# Altium PCB Adapter.PcbDoc
Units mm, origin at the board's own origin, x right, y up, seen from the top; angles counter-clockwise.
Board outline 63.12 x 34.8 mm, 2 copper layers (Top Layer, Bottom Layer); 28 components, 27 nets, 119 pads, 3 vias.
Unrouted connection lines stored in the file: 2.
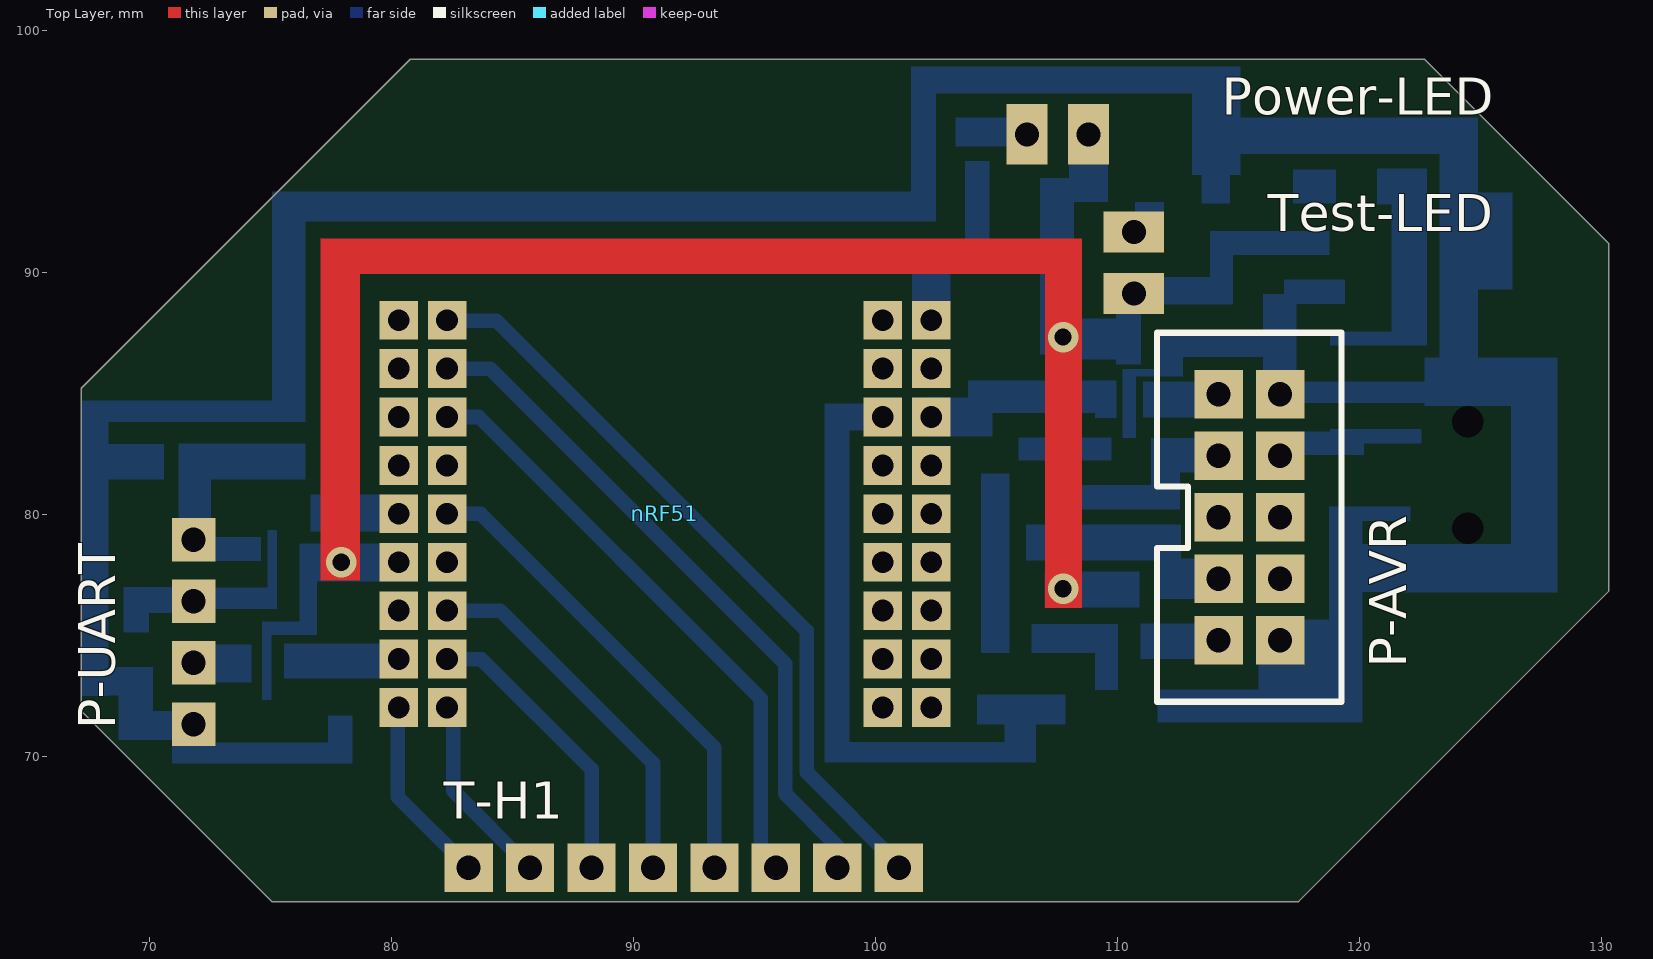
[diagram p0: Top Layer view]
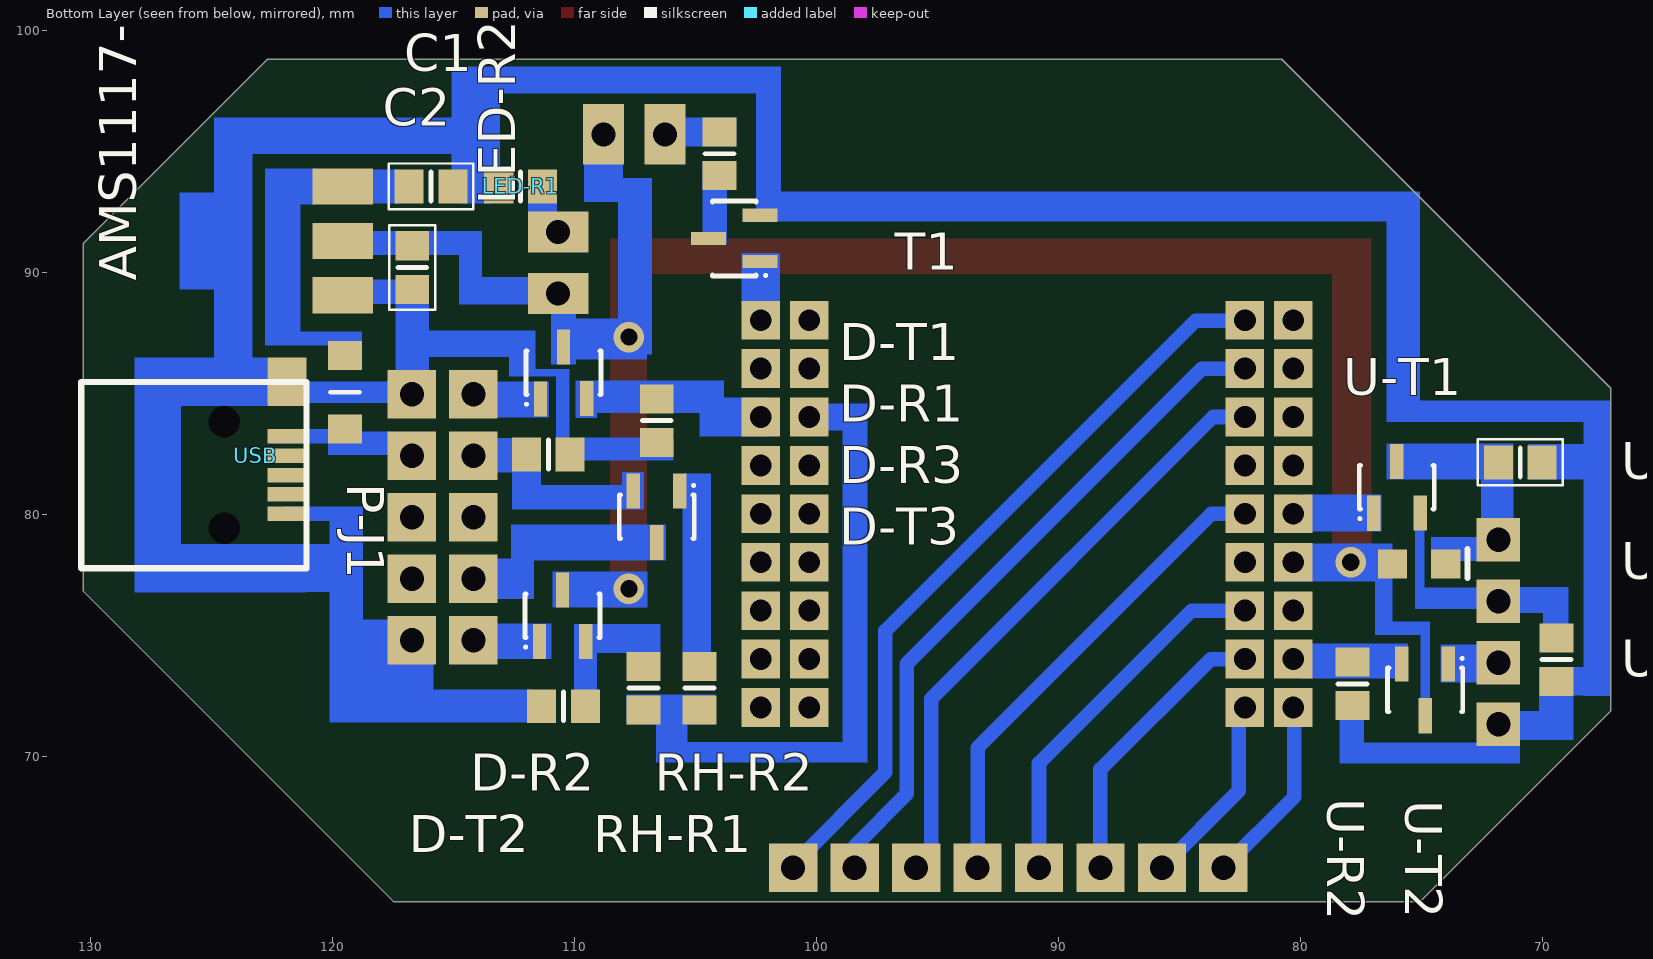
[diagram p1: Bottom Layer view, seen from below]
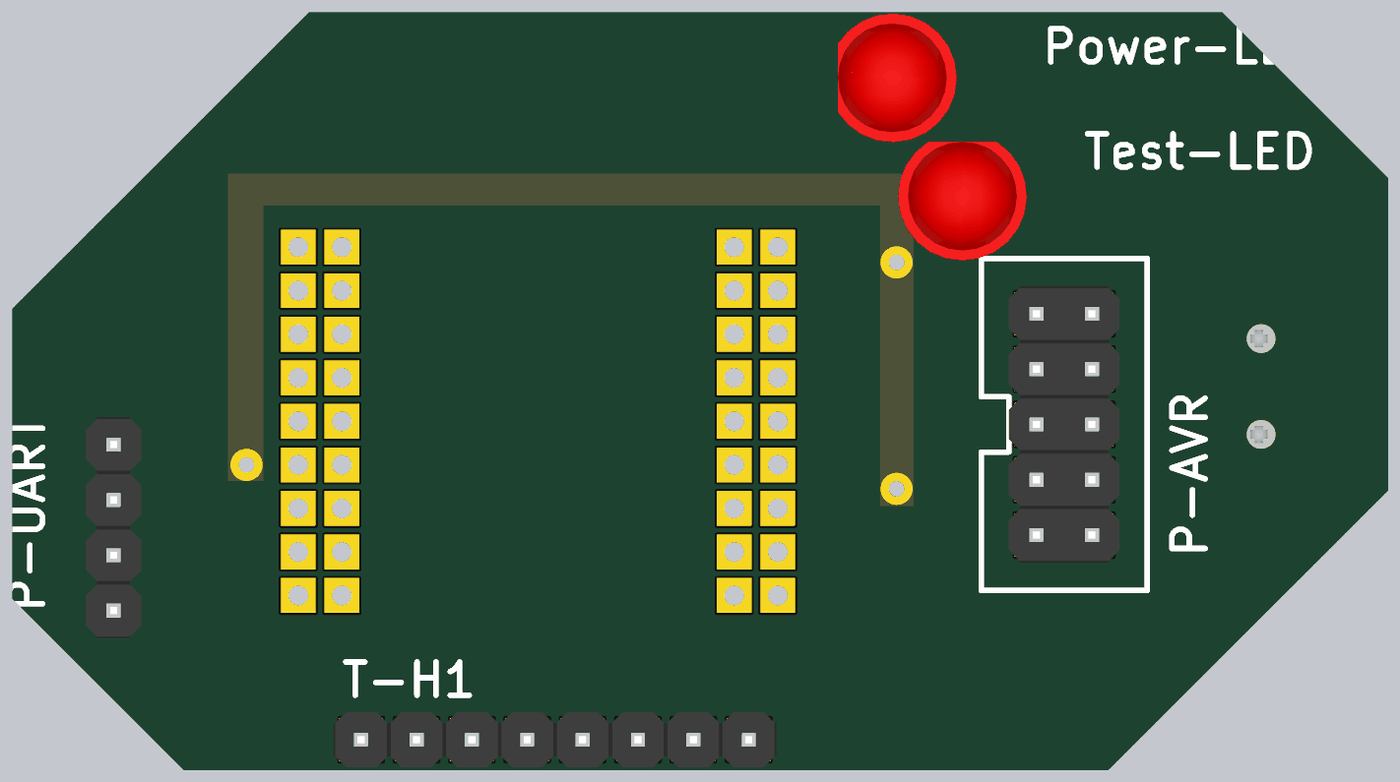
[diagram p2: 3D render of the assembled board from above, using the file's embedded part models]
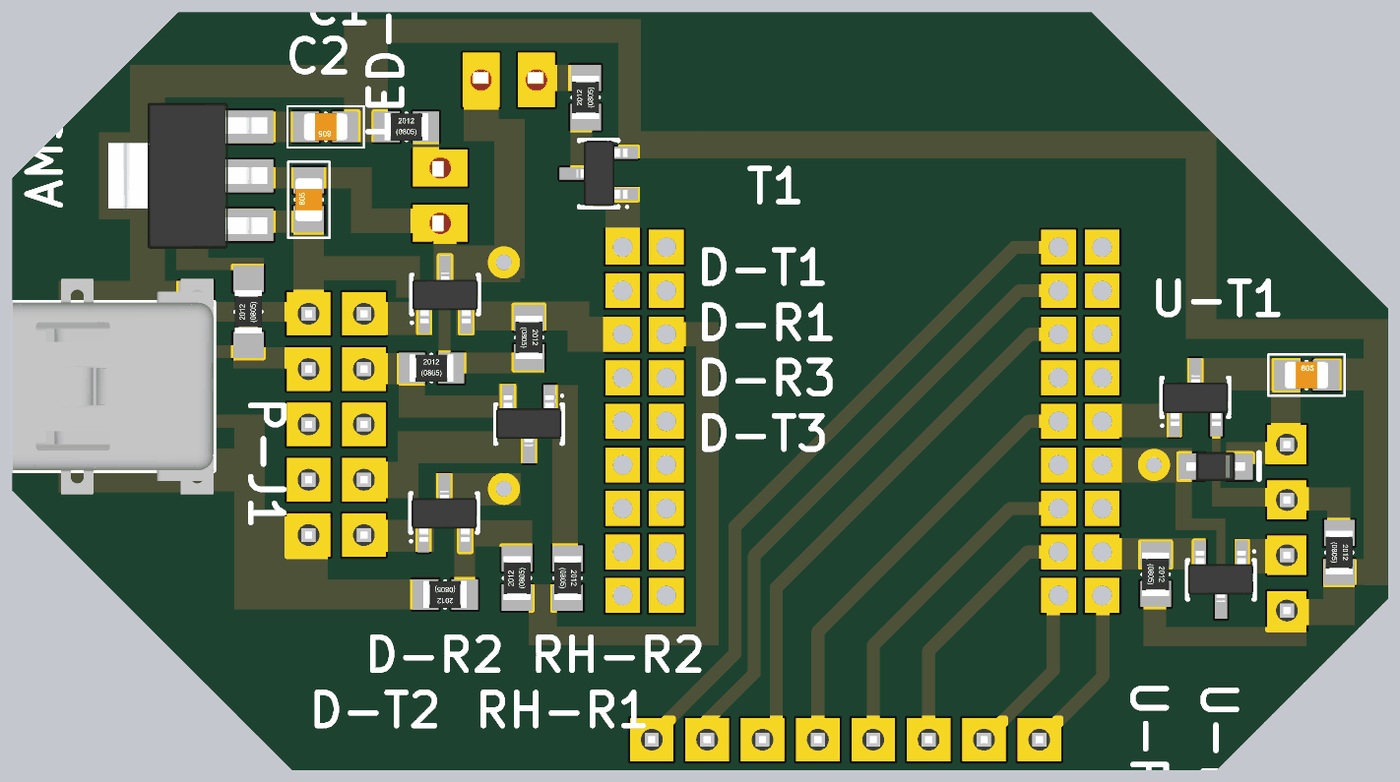
[diagram p3: 3D render of the assembled board from below, using the file's embedded part models]

## Layer stack, top to bottom
Top Solder: solder mask 0.0102, Solder Resist, Dk 3.5
Top Layer: signal copper 0.0356
Dielectric 1: dielectric 0.32, FR-4, Dk 4.8
Bottom Layer: signal copper 0.0356
Bottom Solder: solder mask 0.0102, Solder Resist, Dk 3.5

## Board outline
67.183,71.882 75.057,64.008 117.475,64.008 130.302,76.835 130.302,91.186 122.682,98.806 80.772,98.806 67.183,85.217

## Design rules (kind name [scope] priority, off if disabled: settings)
Clearance [All] p1: gap=0.254
PolygonConnect [All] p1: connectstyle=Relief reliefconductorwidth=0.254 reliefentries=4 polygonreliefangle="90 Angle" airgapwidth=0.254
RoutingVias [All] p1: holewidth=0.711 width=1.27 viastyle="Through Hole" minholewidth=0.711 minwidth=1.27 maxholewidth=0.711 maxwidth=1.27
SolderMaskExpansion [All] p1: expansion=0.102
Width [All] p1: maxlimit=0.254 minlimit=0.254 preferedwidth=0.254
30 further rules are at their usual default settings.

## Classes and differential pairs
component class "Voltage Regulator": AMS1117-3.3 C1 C2
component class Top: LED-R2 nRF51 T1 T-H1 Test-LED
component class Debug: RH-R1 RH-R2
component class Debugging: D-R1 D-R2 D-R3 D-T1 D-T2 D-T3 P-AVR
component class "Serial Port": P-UART U-C1 U-D1 U-R1 U-R2 U-T1 U-T2
component class "USB or Debugger": LED-R1 P-J1 Power-LED USB

## Components (designator, comment, footprint, x,y, rotation, side; value= is the part's Value field where it differs from the comment)
AMS1117-3.3 "T1" SOT-223-3 118.825,88.05 r90 bottom
C1 "22uF" "C 0805 / 2012" 115.925,93.55 r0 bottom
C2 "22uF" "C 0805 / 2012" 116.7,90.2 r90 bottom
D-R1 "5K6" "R 0805 / 2012" 106.6,83.875 r270 bottom
D-R2 "5K6" "R 0805 / 2012" 110.45,72.075 r0 bottom
D-R3 "5K6" "R 0805 / 2012" 111.075,82.475 r180 bottom
D-T1 "2N7000" SOT-23-3 110.45,85.85 r180 bottom
D-T2 "2N7000" SOT-23-3 110.49,75.819 r180 bottom
D-T3 "2N7000" SOT-23-3 106.6,79.9 r0 bottom
LED-R1 "?R" "R 0805 / 2012" 112.225,93.55 r180 bottom
LED-R2 "?R" "R 0805 / 2012" 104,94.9 r90 bottom
nRF51 "Core51822_2" Core51822 79.3,71.025 r0 top
P-AVR "AVR-style JTAG" "Header 2x5" 114.173,84.963 r0 top
P-J1 "0R" "R 0805 / 2012 wide" 119.475,85.05 r90 bottom
P-UART "Header 1x4" "Header 1x4" 71.825,73.875 r270 top
Power-LED "TH Green" "LED 3mm" 110.675,89.125 r90 top
RH-R1 "430R" "R 0805 / 2012" 107.15,72.825 r90 bottom
RH-R2 "430R" "R 0805 / 2012" 104.825,72.825 r270 bottom
T1 "2N7000" SOT-23-3 103.4,91.4 r90 bottom
T-H1 "Header 1x8" "Header 1x8 very long" 88.265,65.405 r0 top
Test-LED "TH Blue" "LED 3mm" 108.8,95.7 r180 top
U-C1 "100nF" "C 0805 / 2012" 70.925,82.15 r180 bottom
U-D1 "Diode" SC-90 75.1,77.975 r180 bottom
U-R1 "5K6" "R 0805 / 2012" 69.425,74 r270 bottom
U-R2 "5K6" "R 0805 / 2012" 77.85,73 r270 bottom
U-T1 "2N7000" SOT-23-3 76.025,81.125 r180 bottom
U-T2 "2N7000" SOT-23-3 74.85,72.75 r0 bottom
USB "P-miniUSB" miniUSB 125.575,81.625 r270 bottom

## Footprints (in the part's own frame and the unit in brackets; to place one, negate y for a bottom-side part, rotate by r counter-clockwise, add the part's x,y. Pads: shape width x height; smd on the part's side, far side on the other; paste and mask are expansions set on the pad)
"C 0805 / 2012" [mm] "Capacitor 0805 / 2012 (2.0 x 1.2 mm)"
  rect 1.2x1.4 smd: 1(-0.9,0) 2(0.9,0)
  silkscreen extent -1.75,-0.95 1.75,0.95, body extent -1,-0.62 1,0.63, height 0.78
Core51822 [mm]
  rect 1.6x1.6 hole 0.9: 1(1,17) 2(3,17) 3(1,15) 4(3,15) 5(1,13) 6(3,13) 7(1,11) 8(3,11) 9(1,9) 10(3,9) 11(1,7) 12(3,7) 13(1,5) 14(3,5) 15(1,3) 16(3,3) 17(1,1) 18(3,1) 19(21,17) 20(23,17) 21(21,15) 22(23,15) 23(21,13) 24(23,13) 25(21,11) 26(23,11) 27(21,9) 28(23,9) 29(21,7) 30(23,7) 31(21,5) 32(23,5) 33(21,3) 34(23,3) 35(21,1) 36(23,1)
"Header 1x4" [mm] "2.54mm"
  rect 1.8x1.8 hole 1: 1(-5.08,0) 2(-2.54,0) 3(0,0) 4(2.54,0)
  body extent -6.35,-1.27 3.81,1.27, height 8.6
"Header 1x8 very long" [mm] "2.54mm"
  rect 2x2 hole 1: 1(-5.08,0) 2(-2.54,0) 3(0,0) 4(2.54,0) 5(5.08,0) 6(7.62,0) 7(10.16,0) 8(12.7,0)
  body extent -6.35,-1.27 13.97,1.27, height 8.6
"Header 2x5" [mm]
  rect 2x2 hole 1: 1(0,0) 2(2.54,0) 3(0,-2.54) 4(2.54,-2.54) 5(0,-5.08) 6(2.54,-5.08) 7(0,-7.62) 8(2.54,-7.62) 9(0,-10.16) 10(2.54,-10.16)
  silkscreen extent -2.54,-12.7 5.08,2.54, body extent -1.27,-11.43 3.81,1.27, height 8.6
"LED 3mm" [mm] "2.54mm"
  rect 1.7x2.5 hole 1: 1(0,0) 2(2.54,0)
  body extent -1.71,-3.05 3.74,2.85, height 18.6
miniUSB [mm]
  rect 0.6x1.6 smd: 1(-1.6,3.7) 2(-0.8,3.7) 3(0,3.7) 4(0.8,3.7) 5(1.6,3.7)
  rect 2x1.6 smd: 6(-3.85,3.7)
  rect 0x0 hole 1.3: 10(-2.2,1.1) 20(2.2,1.1)
  Top Layer region: -4.85,2.9 -2.85,2.9 -2.85,-2.6 -4.85,-2.6
  Top Layer region: 2.85,4.5 4.85,4.5 4.85,-1 2.85,-1
  Top Layer region: 2.85,-1 4.85,-1 4.85,-2.6 2.85,-2.6
  silkscreen extent -3.85,-4.8 3.85,4.5, body extent -4.95,-4.7 4.95,4.5, height 4.14
"R 0805 / 2012" [mm] "Resistor 0805 / 2012 (2.0 x 1.2 mm)"
  rect 1.2x1.4 smd: 1(-0.9,0) 2(0.9,0)
  silkscreen extent 0,-0.6 0,0.6, body extent -1,-0.63 1,0.62, height 0.45
"R 0805 / 2012 wide" [mm] "Resistor 0805 / 2012 (2.0 x 1.2 mm)"
  rect 1.2x1.4 smd: 1(-1.524,0) 2(1.524,0)
  silkscreen extent 0,-0.6 0,0.6, body extent -1,-0.63 1,0.62, height 0.45
SC-90 [mm]
  rect 1.2x1.2 smd: 1(1.1,-0.025) 2(-1.1,-0.025)
  silkscreen extent 2,-0.6 2,0.6, body extent -1.35,-0.7 1.35,0.65, height 0.85
SOT-23-3 [mm]
  rect 0.55x1.45 smd: 1(-0.95,-1.075) 2(0.965,-1.067) 3(0,1.067)
  silkscreen extent -1.58,-1.35 1.55,0.9, body extent -1.49,-1.32 1.51,1.28, height 1.1
SOT-223-3 [mm]
  rect 1.5x2.5 smd: 1(1,0.75) 2(3.25,0.75) 3(5.5,0.75)
  Top Layer region: 1.25,7.5 5.25,7.5 5.25,4.5 1.25,4.5
  body extent -0.1,-0.22 6.6,7.08, height 1.8

## Part data
AMS1117-3.3: library part AMS1117
C1 C2 U-C1: library part Capacitor
D-R1 D-R2 D-R3 LED-R1 LED-R2 P-J1 RH-R1 RH-R2 U-R1 U-R2: library part Resistor
D-T1 D-T2 D-T3 T1 U-T1 U-T2: "N-FET"
P-AVR: library part "JTAG AVR"
P-UART: library part "Header UART"
Power-LED Test-LED: library part LED
USB: library part miniUSB

## Via types
v1: diameter 1.27, hole 0.711, Top Layer to Bottom Layer, 3 vias

## Nets (pads, with @x,y where several pads share a name; then routed paths per layer and width w, separated by ;. In a path a pad name is that pad's centre, name@x,y a point inside that pad or via, vN(x,y) a via of type N, cw(c..) or ccw(c..) an arc to the next point about the centre after c; other vN are vias at no path point)
3.3V: AMS1117-3.3.2 C2.2 D-T1.3 D-T2.3 nRF51.11 Power-LED.1 Test-LED.1 U-D1.2 U-T2.3
  other v1: 107.75,76.925 77.925,78.025 107.75,87.325
5V: AMS1117-3.3.3 C1.2 D-T3.3 P-AVR.4 P-AVR.7 P-J1.1 P-J1.2 USB.1
GND: AMS1117-3.3.1 C1.1 C2.1 D-R1.2 D-R2.2 D-R3.2 LED-R1.1 P-AVR.2 P-AVR.10 P-UART.4 T1.2 U-C1.2 U-R1.2 U-R2.2 USB.5
LV_TDI: D-R2.1 D-T2.2 RH-R1.2
LV_TDO: D-T3.1 RH-R2.1
NetLED-R1_2: LED-R1.2 Power-LED.2
NetLED-R2_1: LED-R2.1 T1.3
NetLED-R2_2: LED-R2.2 Test-LED.2
NetnRF51_2: nRF51.2 T-H1.8 | length 31.5
  Bottom Layer w0.6: nRF51.2 82.314,88.011 84.328,88.011 97.155,75.184 97.155,69.342 100.965,65.532 T-H1.8
NetnRF51_4: nRF51.4 T-H1.7 | length 28.3
  Bottom Layer w0.6: nRF51.4 84.08,86.025 96.266,73.839 96.266,68.453 98.425,66.294 T-H1.7
NetnRF51_6: nRF51.6 T-H1.6 | length 25
  Bottom Layer w0.6: nRF51.6 83.615,84.025 95.25,72.39 95.25,66.04 T-H1.6
NetnRF51_9: nRF51.9 U-T1.1
NetnRF51_10: nRF51.10 T-H1.5 | length 20
  Bottom Layer w0.6: nRF51.10 83.678,80.025 93.345,70.358 T-H1.5
NetnRF51_14: nRF51.14 T-H1.4 | length 15.4
  Bottom Layer w0.6: nRF51.14 84.503,76.025 90.805,69.723 T-H1.4
NetnRF51_15: nRF51.15 U-R2.1 U-T2.2
NetnRF51_16: nRF51.16 T-H1.3 | length 11.9
  Bottom Layer w0.6: nRF51.16 83.709,74.025 88.265,69.469 T-H1.3
NetnRF51_17: nRF51.17 T-H1.1 | length 7.8
  Bottom Layer w0.6: nRF51.17@80.264,71.989 80.264,68.326 T-H1.1
NetnRF51_18: nRF51.18 T-H1.2 | length 7.7
  Bottom Layer w0.6: nRF51.18@82.55,71.775 82.55,68.58 T-H1.2
NetnRF51_20: nRF51.20 T1.1
NetP-UART_1: P-UART.1 U-C1.1 U-D1.1 U-T1.3
NetP-UART_2: P-UART.2 U-R1.1 U-T1.2
NetP-UART_3: P-UART.3 U-T2.1
SWDCLK: D-R1.1 D-T1.2 nRF51.24
SWDIO: nRF51.23 RH-R1.1 RH-R2.2
TCK: D-T1.1 P-AVR.1
TDI: D-T2.1 P-AVR.9
TDO: D-R3.1 D-T3.2 P-AVR.3
pads on no net: nRF51.1 nRF51.3 nRF51.5 nRF51.7 nRF51.8 nRF51.12 nRF51.13 nRF51.19 nRF51.21 nRF51.22 nRF51.25 nRF51.26 nRF51.27 nRF51.28 nRF51.29 nRF51.30 nRF51.31 nRF51.32 nRF51.33 nRF51.34 nRF51.35 nRF51.36 P-AVR.5 P-AVR.6 P-AVR.8 USB.2 USB.3 USB.4 USB.6 USB.10 USB.20

## Other copper
Top Layer:
  rectangle net 3.3V: 107,76.125 108.525,91.4
  rectangle net 3.3V: 77.075,89.925 107.1,91.4
  rectangle net 3.3V: 77.075,77.275 78.7,89.925
Bottom Layer:
  rectangle net GND: 75.057,84.709 76.454,93.345
  rectangle net GND: 68.3,83.82 76.454,84.709
  rectangle net GND: 75.311,92.1 101.473,93.345
  rectangle net NetLED-R2_2: 103.3,95.2 105.6,96.4
  rectangle net NetLED-R2_1: 103.7,91.2 104.7,94.6
  rectangle net NetnRF51_20: 101.5,88.7 103.1,90.8
  rectangle net GND: 101.473,92.1 102.5,97.4
  rectangle net GND: 101.473,97.4 113.075,98.5
  rectangle net 3.3V: 108,92.9 109.6,94.6
  rectangle net 5V: 118.775,82.925 122.55,83.525
  rectangle net GND: 117.525,84.6 126.5,85.5
  rectangle net GND: 116.875,88.7 119.4,89.7
  rectangle net 3.3V: 114.7,90.725 118.75,91.7
  rectangle net TDI: 110.95,74.025 114.075,75.5
  rectangle net LV_TDI: 106.45,74.275 109.35,75.475
  rectangle net LV_TDI: 109.075,72.75 110.025,75.475
  rectangle net SWDIO: 104.2,71.325 107.85,72.55
  rectangle net 5V: 117.625,82.45 120.175,83.425
  rectangle net 5V: 121.325,86.975 122.775,94.3
  rectangle net 5V: 118.775,86.975 121.325,87.55
  rectangle net GND: 116,85.8 117.4,89.1
  rectangle net LV_TDO: 104.35,74.275 105.525,81.7
  rectangle net TDO: 111.375,80.2 112.575,81.875
  rectangle net TDO: 107.125,80.2 111.55,81.225
  rectangle net TDO: 107.125,81.225 108.025,81.75
  rectangle net TDO: 111.375,81.725 114.3,83.15
  rectangle net 5V: 120.725,92.8 121.75,94.3
  rectangle net 5V: 117.25,92.85 119.025,94.25
  rectangle net GND: 118.725,79.725 122.1,80.325
  rectangle net GND: 117.425,71.4 120.125,75.65
  rectangle net GND: 118.725,75.65 120.125,79.725
  rectangle net GND: 111.65,71.4 117.425,72.775
  rectangle net GND: 115.825,72.775 117.425,74.25
  rectangle net 3.3V: 106.975,76.15 110.9,77.65
  rectangle net 5V: 106.225,78.1 112.625,79.575
  rectangle net 5V: 111.675,76.5 112.05,78.1
  rectangle net 5V: 112.05,76.5 113.775,78.175
  rectangle net GND: 105.9,82.225 109.75,83.175
  rectangle net SWDCLK: 103.825,84.2 109.95,85.525
  rectangle net SWDCLK: 109.075,83.975 109.95,85.525
  rectangle net TCK: 111.05,84 113.775,85.5
  rectangle net 3.3V: 109.925,86.2 110.975,88.75
  rectangle net GND: 113.475,92.85 114.65,94.25
  rectangle net NetLED-R1_2: 110.725,92.425 111.925,92.9
  rectangle net GND: 119.975,76.8 127.4,78.775
  rectangle net GND: 126.25,78.4 128.175,85.4
  rectangle net GND: 123.3,84.7 124.9,96.4
  rectangle net GND: 113.075,94.9 124.6,96.4
  rectangle net GND: 113.075,94.025 115.075,98.5
  rectangle net 3.3V: 111.625,88.675 114.775,89.8
  rectangle net 3.3V: 113.825,89.8 114.775,91.7
  rectangle net 3.3V: 107,86.4 110.675,88.1
  rectangle net SWDCLK: 102,83.225 104.825,84.825
  rectangle net SWDIO: 97.9,83.475 99.65,84.575
  rectangle net SWDIO: 97.9,69.75 98.925,83.7
  rectangle net SWDIO: 98.6,69.75 106.625,70.6
  rectangle net SWDIO: 105.325,70.6 106.625,71.775
  rectangle net GND: 110.2,83.15 110.75,86
  rectangle net GND: 111.6,86.5 116.2,87.6
  rectangle net GND: 111.6,85.7 112.7,86.7
  rectangle net GND: 110.75,85.7 111.6,86
  rectangle net 3.3V: 106.8,86.6 108.2,93.9
  rectangle net 3.3V: 76.2,77.225 81.1,78.8
  rectangle net NetnRF51_9: 76.65,79.3 79.875,80.825
  rectangle net NetP-UART_2: 74.875,76.1 75.275,79.35
  rectangle net NetP-UART_2: 71.875,76.1 75.1,76.975
  rectangle net NetP-UART_3: 71.425,73.05 74.225,74.625
  rectangle net NetnRF51_15: 75.55,73.225 80,74.675
  rectangle net 3.3V: 74.65,72.325 75.05,75.575
  rectangle net 3.3V: 75.05,75.025 76.925,75.575
  rectangle net 3.3V: 76.2,75.575 76.925,77.95
  rectangle net GND: 68.725,70.675 71.125,71.875
  rectangle net GND: 68.725,71.875 70.15,73.15
  rectangle net NetP-UART_2: 68.925,75.925 71.075,77
  rectangle net NetP-UART_2: 68.925,75.125 69.975,75.925
  rectangle net NetP-UART_1: 71.2,81.45 76.45,82.925
  rectangle net NetP-UART_1: 71.2,79.625 72.55,81.7
  rectangle net NetP-UART_1: 72.525,78.075 74.6,79.075
  rectangle net GND: 77.375,69.7 78.4,71.7
  rectangle net GND: 70.925,69.7 77.375,70.575
  rectangle net GND: 67.3,81.45 70.6,82.9
  rectangle net GND: 67.2,72.5 68.3,84.709
  rectangle net GND: 68,72.525 70.15,73.7

## Silkscreen, mask and mechanical layers (free items; w line width, h text height)
Mechanical 15:
  the board outline again, w0.254